# Altium PCB Room1.PcbDoc (part 2 of 2)
Units mil, origin at the board's own origin, x right, y up, seen from the top; angles counter-clockwise.
Board outline 3937.01 x 3937.01 mil, 2 copper layers (Top Layer, Bottom Layer); 51 components, 61 nets, 285 pads, 40 vias.
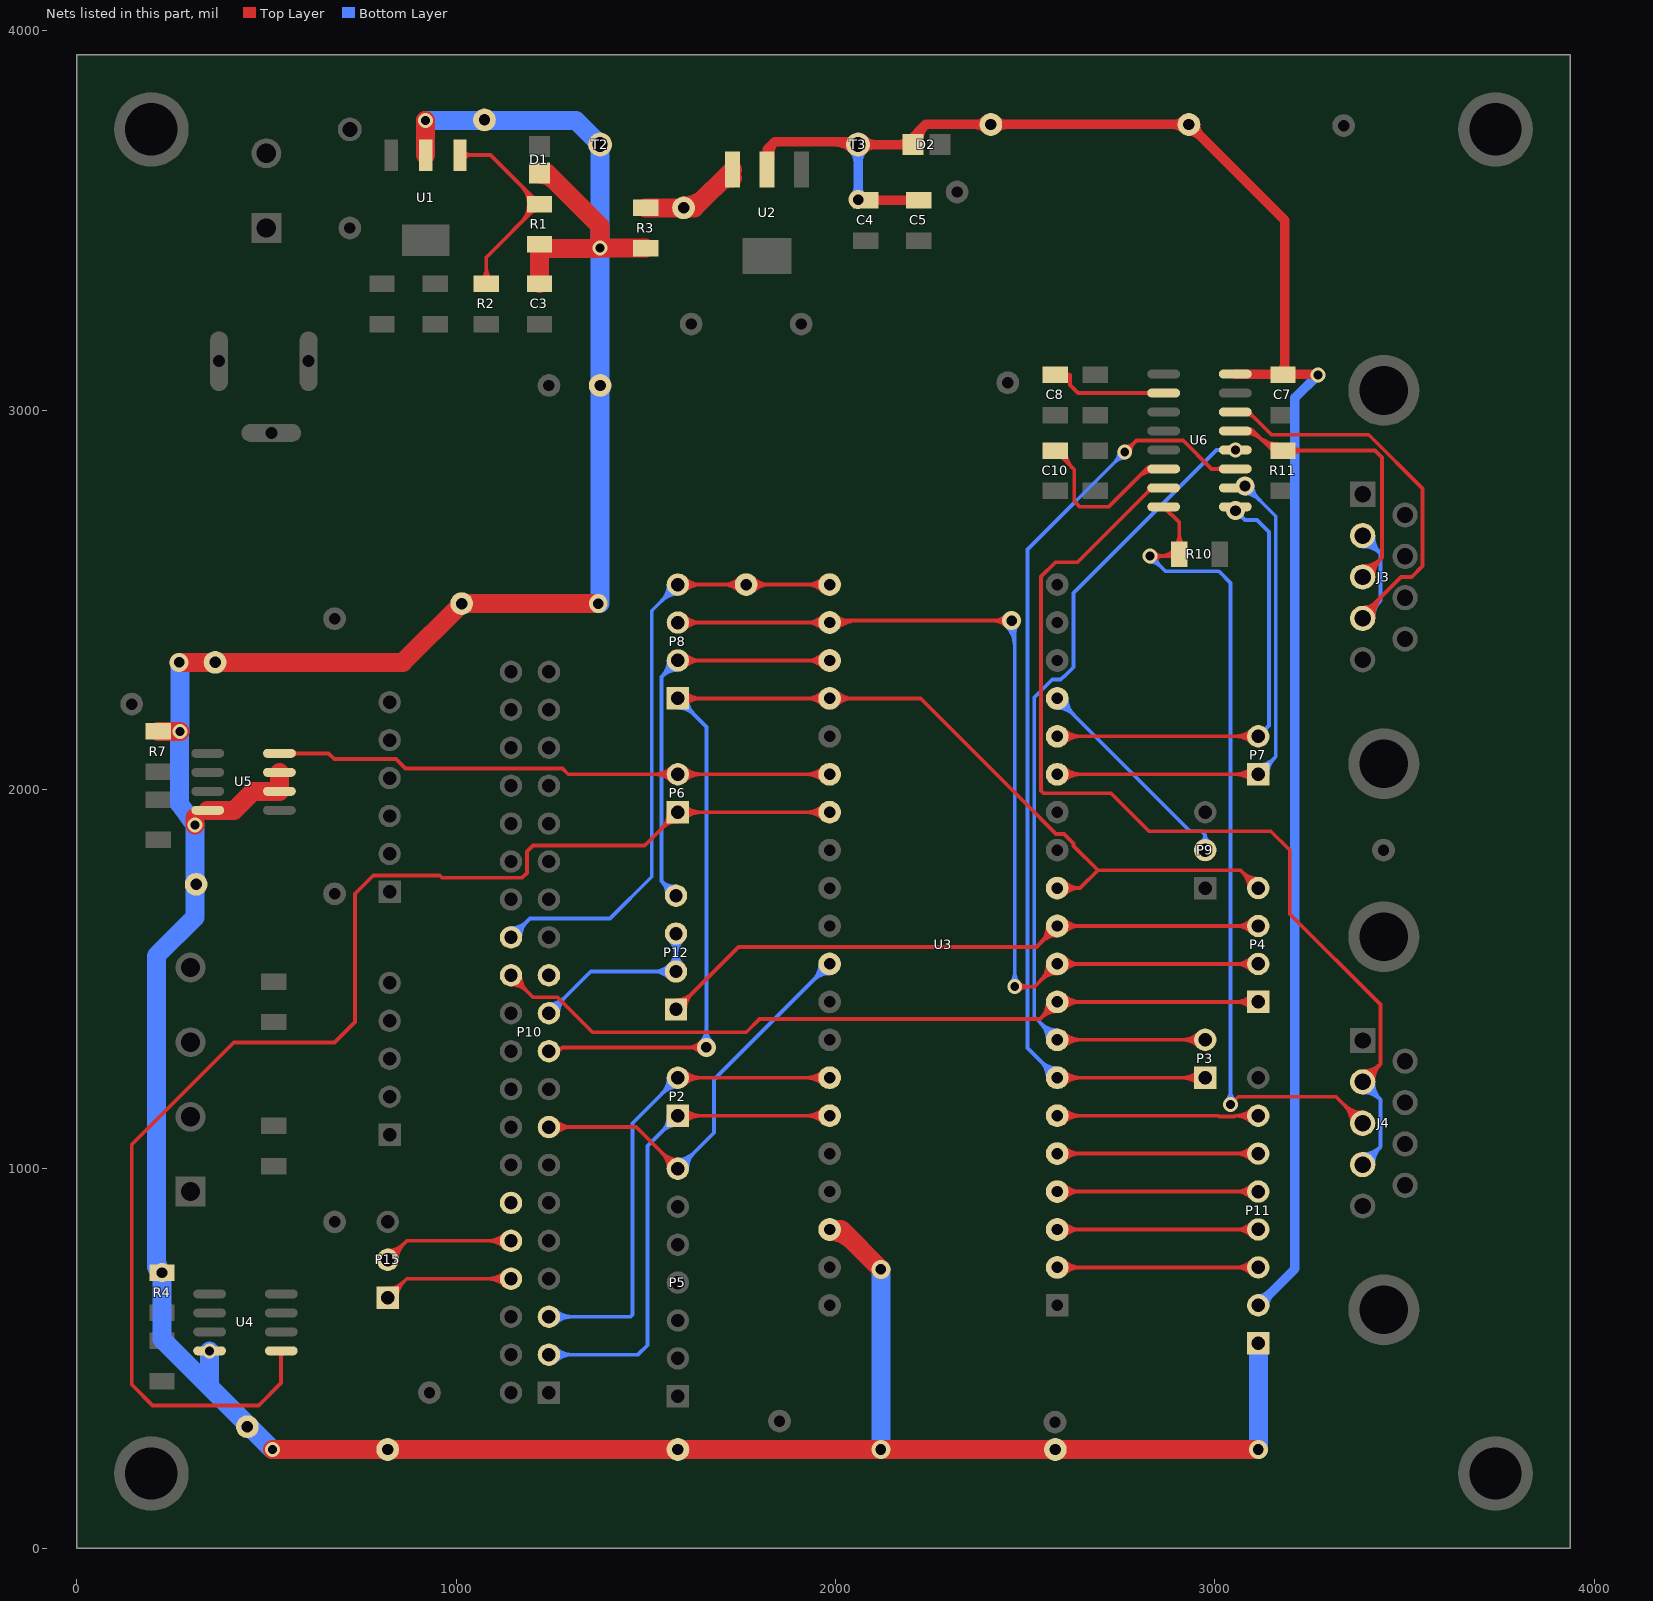
[diagram p2: the nets of this part, all layers, seen from the top]

## Via types
v1: diameter 50, hole 28, Top Layer to Bottom Layer, 25 vias
v2: diameter 39.37, hole 23.62, Top Layer to Bottom Layer, 15 vias

## Nets (pads, with @x,y where several pads share a name; then routed paths per layer and width w, separated by ;. In a path a pad name is that pad's centre, name@x,y a point inside that pad or via, vN(x,y) a via of type N, cw(c..) or ccw(c..) an arc to the next point about the centre after c; other vN are vias at no path point) (continued)
GS2R3: P5.7 P10.15 U3.30 | length 1687.3
  Top Layer w10: P10.15@1245,1110 1475,1110 P5.7@1585,1000 ; P10.15@1255.27,1099.73 cw(c1280.07,1074.93) 1280.07,1110 cw(c1280.07,1145.07) P10.15@1255.27,1120.27 ; P10.15@1262.34,1092.66 cw(c1304.21,1050.79) 1304.21,1110 cw(c1304.21,1169.21) P10.15@1262.34,1127.34 ; P5.7@1560.47,1000 ccw(c1501.26,1000) 1543.13,1041.87 ccw(c1585,1083.74) P5.7@1585,1024.53 ; P5.7@1570.47,1000 ccw(c1535.4,1000) 1560.2,1024.8 ccw(c1585,1049.6) P5.7@1585,1014.53
  Bottom Layer w10: P5.7@1585,1000 1680,1095 1680,1235 U3.30@1985,1540 ; P5.7@1585,1014.53 ccw(c1585,1049.6) 1609.8,1024.8 ccw(c1634.6,1000) P5.7@1599.53,1000 ; P5.7@1585,1024.53 ccw(c1585,1083.74) 1626.87,1041.87 ccw(c1668.74,1000) P5.7@1609.53,1000 ; U3.30@1960,1540 cw(c1899.64,1540) 1942.32,1497.32 cw(c1985,1454.64) U3.30@1985,1515 ; U3.30@1970,1540 cw(c1933.79,1540) 1959.39,1514.39 cw(c1985,1488.79) U3.30@1985,1525
GSA0: P11.6 U3.5 | length 829.8
  Top Layer w10: U3.5@2585,1040 P11.6@3115,1040 ; U3.5@2595.61,1029.39 cw(c2621.21,1003.79) 2621.21,1040 cw(c2621.21,1076.21) U3.5@2595.61,1050.61 ; U3.5@2602.68,1022.32 cw(c2645.36,979.64) 2645.36,1040 cw(c2645.36,1100.36) U3.5@2602.68,1057.68 ; P11.6@3097.66,1022.66 ccw(c3055.79,980.79) 3055.79,1040 ccw(c3055.79,1099.21) P11.6@3097.66,1057.34 ; P11.6@3104.73,1029.73 ccw(c3079.93,1004.93) 3079.93,1040 ccw(c3079.93,1075.07) P11.6@3104.73,1050.27
GSA1: P11.7 U3.6 | length 831.9
  Top Layer w10: U3.6@2585,1140 3009.44,1140 3012,1137.44 3052.44,1137.44 3055,1140 P11.7@3115,1140 ; U3.6@2595.61,1129.39 cw(c2621.21,1103.79) 2621.21,1140 cw(c2621.21,1176.21) U3.6@2595.61,1150.61 ; U3.6@2602.68,1122.32 cw(c2645.36,1079.64) 2645.36,1140 cw(c2645.36,1200.36) U3.6@2602.68,1157.68 ; P11.7@3097.66,1122.66 ccw(c3055.79,1080.79) 3055.79,1140 ccw(c3055.79,1199.21) P11.7@3097.66,1157.34 ; P11.7@3104.73,1129.73 ccw(c3079.93,1104.93) 3079.93,1140 ccw(c3079.93,1175.07) P11.7@3104.73,1150.27
GSC13: P11.3 U3.2 | length 829.8
  Top Layer w10: U3.2@2585,740 P11.3@3115,740 ; U3.2@2595.61,729.39 cw(c2621.21,703.79) 2621.21,740 cw(c2621.21,776.21) U3.2@2595.61,750.61 ; U3.2@2602.68,722.32 cw(c2645.36,679.64) 2645.36,740 cw(c2645.36,800.36) U3.2@2602.68,757.68 ; P11.3@3097.66,722.66 ccw(c3055.79,680.79) 3055.79,740 ccw(c3055.79,799.21) P11.3@3097.66,757.34 ; P11.3@3104.73,729.73 ccw(c3079.93,704.93) 3079.93,740 ccw(c3079.93,775.07) P11.3@3104.73,750.27
GSC14: P11.4 U3.3 | length 829.8
  Top Layer w10: U3.3@2585,840 P11.4@3115,840 ; U3.3@2595.61,829.39 cw(c2621.21,803.79) 2621.21,840 cw(c2621.21,876.21) U3.3@2595.61,850.61 ; U3.3@2602.68,822.32 cw(c2645.36,779.64) 2645.36,840 cw(c2645.36,900.36) U3.3@2602.68,857.68 ; P11.4@3097.66,822.66 ccw(c3055.79,780.79) 3055.79,840 ccw(c3055.79,899.21) P11.4@3097.66,857.34 ; P11.4@3104.73,829.73 ccw(c3079.93,804.93) 3079.93,840 ccw(c3079.93,875.07) P11.4@3104.73,850.27
GSC15: P11.5 U3.4 | length 829.8
  Top Layer w10: U3.4@2585,940 P11.5@3115,940 ; U3.4@2595.61,929.39 cw(c2621.21,903.79) 2621.21,940 cw(c2621.21,976.21) U3.4@2595.61,950.61 ; U3.4@2602.68,922.32 cw(c2645.36,879.64) 2645.36,940 cw(c2645.36,1000.36) U3.4@2602.68,957.68 ; P11.5@3097.66,922.66 ccw(c3055.79,880.79) 3055.79,940 ccw(c3055.79,999.21) P11.5@3097.66,957.34 ; P11.5@3104.73,929.73 ccw(c3079.93,904.93) 3079.93,940 ccw(c3079.93,975.07) P11.5@3104.73,950.27
I2C_SCL: P2.2 P10.5 U3.27 | length 1892.8
  Top Layer w10: P2.2@1585,1240 U3.27@1985,1240 ; P2.2@1595.27,1229.73 cw(c1620.07,1204.93) 1620.07,1240 cw(c1620.07,1275.07) P2.2@1595.27,1250.27 ; P2.2@1602.34,1222.66 cw(c1644.21,1180.79) 1644.21,1240 cw(c1644.21,1299.21) P2.2@1602.34,1257.34 ; U3.27@1967.32,1222.32 ccw(c1924.64,1179.64) 1924.64,1240 ccw(c1924.64,1300.36) U3.27@1967.32,1257.68 ; U3.27@1974.39,1229.39 ccw(c1948.79,1203.79) 1948.79,1240 ccw(c1948.79,1276.21) U3.27@1974.39,1250.61
  Bottom Layer w10: P10.5@1245,610 1460,610 1465,615 1465,1120 P2.2@1585,1240 ; P10.5@1255.27,599.73 cw(c1280.07,574.93) 1280.07,610 cw(c1280.07,645.07) P10.5@1255.27,620.27 ; P10.5@1262.34,592.66 cw(c1304.21,550.79) 1304.21,610 cw(c1304.21,669.21) P10.5@1262.34,627.34 ; P2.2@1560.47,1240 cw(c1501.26,1240) 1543.13,1198.13 cw(c1585,1156.26) P2.2@1585,1215.47 ; P2.2@1570.47,1240 cw(c1535.4,1240) 1560.2,1215.2 cw(c1585,1190.4) P2.2@1585,1225.47
I2C_SDA: P2.1 P10.3 U3.26 | length 1904.5
  Top Layer w10: P2.1@1585,1140 U3.26@1985,1140 ; P2.1@1595.27,1129.73 cw(c1620.07,1104.93) 1620.07,1140 cw(c1620.07,1175.07) P2.1@1595.27,1150.27 ; P2.1@1602.34,1122.66 cw(c1644.21,1080.79) 1644.21,1140 cw(c1644.21,1199.21) P2.1@1602.34,1157.34 ; U3.26@1967.32,1122.32 ccw(c1924.64,1079.64) 1924.64,1140 ccw(c1924.64,1200.36) U3.26@1967.32,1157.68 ; U3.26@1974.39,1129.39 ccw(c1948.79,1103.79) 1948.79,1140 ccw(c1948.79,1176.21) U3.26@1974.39,1150.61
  Bottom Layer w10: P10.3@1245,510 1480,510 1505,535 1505,1060 P2.1@1585,1140 ; P10.3@1255.27,499.73 cw(c1280.07,474.93) 1280.07,510 cw(c1280.07,545.07) P10.3@1255.27,520.27 ; P10.3@1262.34,492.66 cw(c1304.21,450.79) 1304.21,510 cw(c1304.21,569.21) P10.3@1262.34,527.34 ; P2.1@1560.47,1140 cw(c1501.26,1140) 1543.13,1098.13 cw(c1585,1056.26) P2.1@1585,1115.47 ; P2.1@1570.47,1140 cw(c1535.4,1140) 1560.2,1115.2 cw(c1585,1090.4) P2.1@1585,1125.47
J3RX: J3.3 R11.2 U6.13 | length 1218.1
  Top Layer w10: U6.13@3054.49,2945 3101.15,2945 ; U6.13@3084.22,2947.66 cw(c3091.18,2937.16) 3100.08,2946.07 ; U6.13@3085.98,2938.19 cw(c3085.98,2885.13) 3123.5,2922.65 ; U6.13@3085.98,2948.19 cw(c3085.98,2919.27) 3106.43,2939.72 ; U6.13@3089.75,2939.32 cw(c3098.07,2926.76) 3108.73,2937.42 ; U6.13@3091.08,2940.48 cw(c3101.15,2931.52) 3101.15,2945 ; U6.13@3091.08,2949.52 ccw(c3101.15,2958.48) 3101.15,2945 ; 3113.83,2932.32 ccw(c3168.19,2986.68) R11.2@3168.19,2909.8 ; 3130.9,2915.25 ccw(c3168.19,2952.54) R11.2@3168.19,2899.8 ; R11.2@3203.59,2881.37 cw(c3232.02,2852.94) 3232.02,2893.15 cw(c3232.02,2933.36) R11.2@3203.59,2904.93 ; J3.3@3390.08,2560 3441,2610.92 3441,2875 3422.85,2893.15 R11.2@3180,2893.15 3153,2893.15 3101.15,2945 ; J3.3@3390.08,2578.27 ccw(c3390.08,2622.37) 3421.26,2591.18 ccw(c3452.45,2560) J3.3@3408.35,2560 ; J3.3@3390.08,2588.27 ccw(c3390.08,2656.51) 3438.33,2608.26 ccw(c3486.59,2560) J3.3@3418.35,2560
J3TX: J3.2 J3.4 U6.14 | length 1802.3
  Top Layer w10: U6.14@3054.49,2995 3090,2995 3150,2935 3406.28,2935 3548.03,2793.25 3548.03,2588.69 3519.34,2560 3491.16,2560 J3.4@3390.08,2458.91 ; U6.14@3085.98,2988.19 cw(c3085.98,2962.05) 3104.47,2980.53 ; J3.4@3386.09,2454.93 J3.4@3390.08,2450.95 ; J3.4@3390.08,2479.21 ccw(c3390.08,2528.22) 3424.73,2493.57 ; J3.4@3398.35,2450.95 cw(c3437.54,2450.95) 3409.83,2478.66 ; J3.4@3408.35,2450.95 cw(c3471.68,2450.95) 3426.9,2495.73 ; J3.4@3418.35,2450.95 cw(c3505.83,2450.95) 3443.97,2512.8
  Bottom Layer w10: J3.4@3390.08,2450.95 3437,2497.87 ; J3.2@3390.08,2669.06 3437,2622.13 ; J3.4@3390.44,2469.21 ccw(c3391.27,2510.4) 3420.4,2481.27 ccw(c3449.53,2452.14) J3.4@3408.34,2451.31 ; J3.2@3390.44,2650.79 cw(c3391.27,2609.61) 3420.4,2638.73 cw(c3449.53,2667.86) J3.2@3408.34,2668.69 ; J3.4@3390.64,2479.21 ccw(c3391.92,2542.94) 3437,2497.87 ; J3.2@3390.64,2640.79 cw(c3391.92,2577.06) 3437,2622.14 ; J3.4@3418.34,2451.51 cw(c3482.07,2452.79) 3437,2497.87 ; J3.2@3418.34,2668.49 ccw(c3482.07,2667.21) 3437,2622.14 ; 3437,2497.87 3437,2622.13
J4RX: J4.3 R10.2 U6.8 | length 2727.6
  Top Layer w10: v2(2830,2615) R10.2@2906.85,2615 ; v2@2840.38,2604.62 cw(c2865.45,2579.55) 2865.45,2615 cw(c2865.45,2650.45) v2@2840.38,2625.38 ; 2854.57,2615 ccw(c2854.57,2672.28) R10.2@2895.07,2631.78 ; U6.8@2865.51,2745 2906.85,2703.66 R10.2@2906.85,2620 R10.2@2906.85,2608 ; R10.2@2895.07,2608.22 ccw(c2878.72,2591.87) 2878.72,2615 ccw(c2878.72,2648.13) R10.2@2902.15,2624.7 ; R10.2@2895.07,2643.59 ccw(c2866.64,2672.02) 2906.85,2672.02 ccw(c2947.06,2672.02) R10.2@2918.63,2643.59 ; v2(3042,1170) 3062,1190 3320.08,1190 J4.3@3390.08,1120 ; J4.3@3361.81,1120 ccw(c3293.57,1120) 3341.82,1168.26 ccw(c3390.08,1216.51) J4.3@3390.08,1148.27 ; J4.3@3371.81,1120 ccw(c3327.71,1120) 3358.89,1151.18 ccw(c3390.08,1182.37) J4.3@3390.08,1138.27
  Bottom Layer w10: v2@2830,2600.31 cw(c2830,2564.86) 2855.07,2589.93 cw(c2880.14,2615) v2@2844.69,2615 ; v2(2830,2615) 2870,2575 3011,2575 3042,2544 v2(3042,1170) ; v2@3031.62,1180.38 ccw(c3006.55,1205.45) 3042,1205.45 ccw(c3077.45,1205.45) v2@3052.38,1180.38
J4TX: J4.2 J4.4 U6.7 | length 3224.6
  Top Layer w10: 2822.36,2783.36 cw(c2834.02,2771.71) U6.7@2834.02,2788.19 ; 2822.4,2783.4 ccw(c2810.8,2795) U6.7@2827.2,2795 ; U6.7@2865.51,2795 2834,2795 2638,2599 2580,2599 2542.13,2561.13 2542.13,1997 2549.13,1990 2727,1990 2827,1890 3148,1890 3198,1840 3198,1672 3437,1433 3437,1275.98 ; J4.2@3390.08,1229.06 3437,1275.98 ; J4.2@3390.44,1247.32 ccw(c3391.27,1288.51) 3420.4,1259.38 ccw(c3449.53,1230.25) J4.2@3408.34,1229.42 ; J4.2@3390.64,1257.32 ccw(c3391.92,1321.05) 3437,1275.98 ; J4.2@3418.34,1229.62 cw(c3482.07,1230.9) 3437,1275.98
  Bottom Layer w10: J4.4@3390.08,1010.95 3437,1057.87 ; J4.2@3390.08,1229.06 3437,1182.13 ; J4.4@3390.44,1029.21 ccw(c3391.27,1070.4) 3420.4,1041.27 ccw(c3449.53,1012.14) J4.4@3408.34,1011.31 ; J4.2@3390.44,1210.79 cw(c3391.27,1169.61) 3420.4,1198.73 cw(c3449.53,1227.86) J4.2@3408.34,1228.69 ; J4.4@3390.64,1039.21 ccw(c3391.92,1102.94) 3437,1057.87 ; J4.2@3390.64,1200.79 cw(c3391.92,1137.06) 3437,1182.14 ; J4.4@3418.34,1011.51 cw(c3482.07,1012.79) 3437,1057.87 ; J4.2@3418.34,1228.49 ccw(c3482.07,1227.21) 3437,1182.14 ; 3437,1057.87 3437,1182.13
NetR1_1: R1.1 R2.2 U1.1 | length 838.6
  Top Layer w10: U1.1@1010.55,3672.2 1090.95,3672.2 R1.1@1220,3543.15 1080,3403.15 R2.2@1080,3333.15 ; U1.1@1019.54,3663.21 cw(c1041.25,3641.5) 1041.25,3672.2 cw(c1041.25,3702.9) U1.1@1019.54,3681.2 ; R2.2@1068.22,3344.93 ccw(c1039.79,3373.36) 1080,3373.36 ccw(c1120.21,3373.36) R2.2@1091.78,3344.93 ; 1171.41,3494.56 ccw(c1122.82,3543.15) 1191.54,3543.15 ccw(c1122.82,3543.15) 1171.41,3591.74 ; 1188.48,3511.63 ccw(c1156.96,3543.15) 1201.54,3543.15 ccw(c1156.96,3543.15) 1188.48,3574.67 ; R1.1@1199.92,3523.07 cw(c1208.19,3514.81) R1.1@1208.19,3526.5 ; R1.1@1199.92,3563.23 ccw(c1208.19,3571.49) R1.1@1208.19,3559.8
NetR3_2: pad.17 R3.2 U2.3 | length 376.8
  Top Layer w50: R3.2@1500,3533.15 1628.42,3533.15 U2.3@1729.45,3634.17 ; pad.17@1600,3538.15 ccw(c1600,3618.84) 1657.06,3561.78 ; 1691.47,3596.2 cw(c1729.45,3558.23) U2.3@1729.45,3611.93
NRST: P9.2 U3.17 | length 775.6
  Bottom Layer w10: U3.17@2585,2215 cw(c2585,2154.64) 2627.68,2197.32 cw(c2670.36,2240) U3.17@2610,2240 ; U3.17@2585,2225 cw(c2585,2188.79) 2610.61,2214.39 cw(c2636.21,2240) U3.17@2600,2240 ; U3.17@2585,2240 2935,1890 2965,1890 2975,1880 ; P9.2@2963.88,1861.86 ccw(c2954.65,1880) 2975,1880 ; P9.2@2975,1840 2975,1880 ; P9.2@2986.12,1861.86 cw(c2995.35,1880) 2975,1880
RGR2S1: P10.12
RU0RX: P10.10 P15.2 | length 641.9
  Top Layer w10: P15.2@820,760 870,810 P10.10@1145,810 ; P15.2@820,774.53 ccw(c820,809.6) 844.8,784.8 ccw(c869.6,760) P15.2@834.53,760 ; P15.2@820,784.53 ccw(c820,843.74) 861.87,801.87 ccw(c903.74,760) P15.2@844.53,760 ; P10.10@1127.66,792.66 ccw(c1085.79,750.79) 1085.79,810 ccw(c1085.79,869.21) P10.10@1127.66,827.34 ; P10.10@1134.73,799.73 ccw(c1109.93,774.93) 1109.93,810 ccw(c1109.93,845.07) P10.10@1134.73,820.27
RU0TX: P10.8 P15.1 | length 641.9
  Top Layer w10: P15.1@820,660 870,710 P10.8@1145,710 ; P15.1@820,674.53 ccw(c820,709.6) 844.8,684.8 ccw(c869.6,660) P15.1@834.53,660 ; P15.1@820,684.53 ccw(c820,743.74) 861.87,701.87 ccw(c903.74,660) P15.1@844.53,660 ; P10.8@1127.66,692.66 ccw(c1085.79,650.79) 1085.79,710 ccw(c1085.79,769.21) P10.8@1127.66,727.34 ; P10.8@1134.73,699.73 ccw(c1109.93,674.93) 1109.93,710 ccw(c1109.93,745.07) P10.8@1134.73,720.27
SPI1_MISO: P4.3 P12.1 U3.11 | length 2225.7
  Top Layer w10: P12.1@1580,1420 1745,1585 2530,1585 U3.11@2585,1640 P4.3@3115,1640 ; P12.1@1580,1434.53 ccw(c1580,1469.6) 1604.8,1444.8 ccw(c1629.6,1420) P12.1@1594.53,1420 ; P12.1@1580,1444.53 ccw(c1580,1503.74) 1621.87,1461.87 ccw(c1663.74,1420) P12.1@1604.53,1420 ; U3.11@2560,1640 cw(c2499.64,1640) 2542.32,1597.32 cw(c2585,1554.64) U3.11@2585,1615 ; U3.11@2570,1640 cw(c2533.79,1640) 2559.39,1614.39 cw(c2585,1588.79) U3.11@2585,1625 ; U3.11@2595.61,1629.39 cw(c2621.21,1603.79) 2621.21,1640 cw(c2621.21,1676.21) U3.11@2595.61,1650.61 ; U3.11@2602.68,1622.32 cw(c2645.36,1579.64) 2645.36,1640 cw(c2645.36,1700.36) U3.11@2602.68,1657.68 ; P4.3@3097.66,1622.66 ccw(c3055.79,1580.79) 3055.79,1640 ccw(c3055.79,1699.21) P4.3@3097.66,1657.34 ; P4.3@3104.73,1629.73 ccw(c3079.93,1604.93) 3079.93,1640 ccw(c3079.93,1675.07) P4.3@3104.73,1650.27
SPI1_MOSI: P4.4 P8.1 P10.19 U3.12 U3.37 | length 4294.9
  Top Layer w10: P10.19@1245,1310 1270,1310 1280,1320 v1(1660,1320) ; P8.1@1585,2240 U3.37@1985,2240 2225,2240 2542.13,1922.87 2542.13,1922.24 2581.49,1882.87 2602.76,1882.87 2627.87,1857.76 2627.87,1851.13 2692,1787 ; P8.1@1595.27,2229.73 cw(c1620.07,2204.93) 1620.07,2240 cw(c1620.07,2275.07) P8.1@1595.27,2250.27 ; P8.1@1602.34,2222.66 cw(c1644.21,2180.79) 1644.21,2240 cw(c1644.21,2299.21) P8.1@1602.34,2257.34 ; v1@1645.86,1305.86 ccw(c1611.72,1271.72) 1611.72,1320 ccw(c1611.72,1368.28) v1@1645.86,1334.14 ; U3.37@1967.32,2222.32 ccw(c1924.64,2179.64) 1924.64,2240 ccw(c1924.64,2300.36) U3.37@1967.32,2257.68 ; U3.37@1974.39,2229.39 ccw(c1948.79,2203.79) 1948.79,2240 ccw(c1948.79,2276.21) U3.37@1974.39,2250.61 ; U3.37@1995.61,2229.39 cw(c2021.21,2203.79) 2021.21,2240 cw(c2021.21,2276.21) U3.37@1995.61,2250.61 ; U3.37@2002.68,2222.32 cw(c2045.36,2179.64) 2045.36,2240 cw(c2045.36,2300.36) U3.37@2002.68,2257.68 ; U3.12@2585,1740 2645,1740 ; U3.12@2595.65,1729.44 cw(c2621,1704.3) 2621,1740 cw(c2621,1775.7) U3.12@2595.65,1750.56 ; U3.12@2602.75,1722.4 cw(c2645,1680.51) 2645,1740 ; U3.12@2602.75,1757.6 ccw(c2645,1799.49) 2645,1740 ; P4.4@3090.47,1740 ccw(c3031.26,1740) 3073.13,1781.87 ccw(c3115,1823.74) P4.4@3115,1764.53 ; P4.4@3100.47,1740 ccw(c3065.4,1740) 3090.2,1764.8 ccw(c3115,1789.6) P4.4@3115,1754.53 ; P4.4@3115,1740 3068,1787 2692,1787 ; 2645,1740 2692,1787
  Bottom Layer w10: P8.1@1585,2215.47 cw(c1585,2156.26) 1626.87,2198.13 cw(c1668.74,2240) P8.1@1609.53,2240 ; P8.1@1585,2225.47 cw(c1585,2190.4) 1609.8,2215.2 cw(c1634.6,2240) P8.1@1599.53,2240 ; P8.1@1585,2240 1660,2165 v1@1660,1335 ; v1@1645.86,1334.14 ccw(c1611.72,1368.28) 1660,1368.28 ccw(c1708.28,1368.28) v1@1674.14,1334.14 ; v1@1650,1338 1660,1328 v1(1660,1320)
SPI1_NSS: P4.1 P10.24 U3.9 | length 2664.9
  Top Layer w10: P10.24@1145,1485.47 cw(c1145,1426.26) 1186.87,1468.13 cw(c1228.74,1510) P10.24@1169.53,1510 ; P10.24@1145,1495.47 cw(c1145,1460.4) 1169.8,1485.2 cw(c1194.6,1510) P10.24@1159.53,1510 ; P10.24@1145,1510 1202.6,1452.4 1267.6,1452.4 1360,1360 1765,1360 1800,1395 2540,1395 U3.9@2585,1440 P4.1@3115,1440 ; U3.9@2560,1440 cw(c2499.64,1440) 2542.32,1397.32 cw(c2585,1354.64) U3.9@2585,1415 ; U3.9@2570,1440 cw(c2533.79,1440) 2559.39,1414.39 cw(c2585,1388.79) U3.9@2585,1425 ; U3.9@2595.61,1429.39 cw(c2621.21,1403.79) 2621.21,1440 cw(c2621.21,1476.21) U3.9@2595.61,1450.61 ; U3.9@2602.68,1422.32 cw(c2645.36,1379.64) 2645.36,1440 cw(c2645.36,1500.36) U3.9@2602.68,1457.68 ; P4.1@3097.66,1422.66 ccw(c3055.79,1380.79) 3055.79,1440 ccw(c3055.79,1499.21) P4.1@3097.66,1457.34 ; P4.1@3104.73,1429.73 ccw(c3079.93,1404.93) 3079.93,1440 ccw(c3079.93,1475.07) P4.1@3104.73,1450.27
SPI1_SCK: P4.2 P8.3 U3.10 U3.39 | length 3697.3
  Top Layer w10: P8.3@1585,2440 U3.39@1985,2440 1990,2445 v1(2465,2445) ; P8.3@1595.27,2429.73 cw(c1620.07,2404.93) 1620.07,2440 cw(c1620.07,2475.07) P8.3@1595.27,2450.27 ; P8.3@1602.34,2422.66 cw(c1644.21,2380.79) 1644.21,2440 cw(c1644.21,2499.21) P8.3@1602.34,2457.34 ; U3.39@1967.32,2422.32 ccw(c1924.64,2379.64) 1924.64,2440 ccw(c1924.64,2500.36) U3.39@1967.32,2457.68 ; U3.39@1974.39,2429.39 ccw(c1948.79,2403.79) 1948.79,2440 ccw(c1948.79,2476.21) U3.39@1974.39,2450.61 ; U3.39@1995.61,2429.39 cw(c2033.28,2391.72) 2033.28,2445 cw(c2033.28,2488.28) U3.39@2002.68,2457.68 ; U3.39@2002.68,2422.32 cw(c2057.43,2367.57) 2057.43,2445 ; v1@2450.86,2430.86 ccw(c2416.72,2396.72) 2416.72,2445 ccw(c2416.72,2493.28) v1@2450.86,2459.14 ; v2(2473,1480) 2525,1480 U3.10@2585,1540 P4.2@3115,1540 ; v2@2483.38,1469.62 cw(c2508.45,1444.55) 2508.45,1480 cw(c2508.45,1515.45) v2@2483.38,1490.38 ; U3.10@2560,1540 cw(c2499.64,1540) 2542.32,1497.32 cw(c2585,1454.64) U3.10@2585,1515 ; U3.10@2570,1540 cw(c2533.79,1540) 2559.39,1514.39 cw(c2585,1488.79) U3.10@2585,1525 ; U3.10@2595.61,1529.39 cw(c2621.21,1503.79) 2621.21,1540 cw(c2621.21,1576.21) U3.10@2595.61,1550.61 ; U3.10@2602.68,1522.32 cw(c2645.36,1479.64) 2645.36,1540 cw(c2645.36,1600.36) U3.10@2602.68,1557.68 ; P4.2@3097.66,1522.66 ccw(c3055.79,1480.79) 3055.79,1540 ccw(c3055.79,1599.21) P4.2@3097.66,1557.34 ; P4.2@3104.73,1529.73 ccw(c3079.93,1504.93) 3079.93,1540 ccw(c3079.93,1575.07) P4.2@3104.73,1550.27
  Bottom Layer w10: v1@2450.86,2430.86 cw(c2397.4,2377.4) 2473,2377.4 ; v1@2457.93,2437.93 cw(c2421.54,2401.54) 2473,2401.54 ; v2@2462.62,1490.38 ccw(c2437.55,1515.45) 2473,1515.45 ccw(c2508.45,1515.45) v2@2483.38,1490.38 ; v2(2473,1480) v1@2473,2437 ; 2473,2416.03 cw(c2493.97,2416.03) v1@2479.14,2430.86
SPI2_MISO: P8.2 P12.4 U3.38 | length 1628.5
  Top Layer w10: P8.2@1585,2340 U3.38@1985,2340 ; P8.2@1595.27,2329.73 cw(c1620.07,2304.93) 1620.07,2340 cw(c1620.07,2375.07) P8.2@1595.27,2350.27 ; P8.2@1602.34,2322.66 cw(c1644.21,2280.79) 1644.21,2340 cw(c1644.21,2399.21) P8.2@1602.34,2357.34 ; U3.38@1967.32,2322.32 ccw(c1924.64,2279.64) 1924.64,2340 ccw(c1924.64,2400.36) U3.38@1967.32,2357.68 ; U3.38@1974.39,2329.39 ccw(c1948.79,2303.79) 1948.79,2340 ccw(c1948.79,2376.21) U3.38@1974.39,2350.61
  Bottom Layer w10: P12.4@1555.53,1721.74 ccw(c1509.05,1725.04) 1542,1758 ; P8.2@1560.47,2340 cw(c1501.26,2340) 1543.13,2298.13 cw(c1585,2256.26) P8.2@1585,2315.47 ; P12.4@1565.51,1721.03 ccw(c1537.98,1722.99) 1557.49,1742.51 ccw(c1577.01,1762.02) P12.4@1578.97,1734.49 ; P8.2@1570.47,2340 cw(c1535.4,2340) 1560.2,2315.2 cw(c1585,2290.4) P8.2@1585,2325.47 ; P12.4@1578.26,1744.47 cw(c1574.96,1790.95) 1542,1758 ; P12.4@1580,1720 1542,1758 ; P8.2@1585,2340 1542,2297 1542,1758
SPI2_NSS: P8.4 P10.26 pad.27 U3.40 | length 2535.2
  Top Layer w10: P8.4@1585,2540 U3.40@1985,2540 ; P8.4@1595.27,2529.73 cw(c1620.07,2504.93) 1620.07,2540 cw(c1620.07,2575.07) P8.4@1595.27,2550.27 ; P8.4@1602.34,2522.66 cw(c1644.21,2480.79) 1644.21,2540 cw(c1644.21,2599.21) P8.4@1602.34,2557.34 ; pad.27@1747.32,2522.32 ccw(c1704.64,2479.64) 1704.64,2540 ccw(c1704.64,2600.36) pad.27@1747.32,2557.68 ; pad.27@1754.39,2529.39 ccw(c1728.79,2503.79) 1728.79,2540 ccw(c1728.79,2576.21) pad.27@1754.39,2550.61 ; pad.27@1775.61,2529.39 cw(c1801.21,2503.79) 1801.21,2540 cw(c1801.21,2576.21) pad.27@1775.61,2550.61 ; pad.27@1782.68,2522.32 cw(c1825.36,2479.64) 1825.36,2540 cw(c1825.36,2600.36) pad.27@1782.68,2557.68 ; U3.40@1967.32,2522.32 ccw(c1924.64,2479.64) 1924.64,2540 ccw(c1924.64,2600.36) U3.40@1967.32,2557.68 ; U3.40@1974.39,2529.39 ccw(c1948.79,2503.79) 1948.79,2540 ccw(c1948.79,2576.21) U3.40@1974.39,2550.61
  Bottom Layer w10: P10.26@1145,1610 1195,1660 1406,1660 1516,1770 1516,2471 P8.4@1585,2540 ; P10.26@1145,1624.53 ccw(c1145,1659.6) 1169.8,1634.8 ccw(c1194.6,1610) P10.26@1159.53,1610 ; P10.26@1145,1634.53 ccw(c1145,1693.74) 1186.87,1651.87 ccw(c1228.74,1610) P10.26@1169.53,1610 ; P8.4@1560.47,2540 cw(c1501.26,2540) 1543.13,2498.13 cw(c1585,2456.26) P8.4@1585,2515.47 ; P8.4@1570.47,2540 cw(c1535.4,2540) 1560.2,2515.2 cw(c1585,2490.4) P8.4@1585,2525.47
SPI_MISO: P10.21 P12.2 P12.3 | length 1073
  Bottom Layer w10: P10.21@1245,1410 1355,1520 P12.2@1580,1520 P12.3@1580,1620 ; P10.21@1245,1424.53 ccw(c1245,1459.6) 1269.8,1434.8 ccw(c1294.6,1410) P10.21@1259.53,1410 ; P10.21@1245,1434.53 ccw(c1245,1493.74) 1286.87,1451.87 ccw(c1328.74,1410) P10.21@1269.53,1410 ; P12.2@1562.66,1502.66 ccw(c1520.79,1460.79) 1520.79,1520 ccw(c1520.79,1579.21) 1562.66,1537.34 ccw(c1520.79,1579.21) 1580,1579.21 ccw(c1639.21,1579.21) P12.2@1597.34,1537.34 ; P12.3@1562.66,1602.66 cw(c1520.79,1560.79) 1580,1560.79 cw(c1639.21,1560.79) P12.3@1597.34,1602.66 ; P12.2@1569.73,1509.73 ccw(c1544.93,1484.93) 1544.93,1520 ccw(c1544.93,1555.07) 1569.73,1530.27 ccw(c1544.93,1555.07) 1580,1555.07 ccw(c1615.07,1555.07) P12.2@1590.27,1530.27 ; P12.3@1569.73,1609.73 cw(c1544.93,1584.93) 1580,1584.93 cw(c1615.07,1584.93) P12.3@1590.27,1609.73
SPI_SCLK: P10.23
U1RX: P6.1 U3.34 U4.1 | length 4072.5
  Top Layer w10: U4.1@534.67,515.18 cw(c524.22,504.73) 539,504.73 ; 539,502.38 cw(c557.11,502.38) U4.1@544.3,515.18 ; U4.1@539.49,520 539,520 539,435 480,376 200,376 145,431 145,1064 414,1333 680,1333 734,1387 734,1725 782,1773 957,1773 963,1767 1174.4,1767 1187.4,1780 1187.4,1836.8 1203,1852.4 1497.4,1852.4 P6.1@1585,1940 U3.34@1985,1940 ; P6.1@1560.47,1940 cw(c1501.26,1940) 1543.13,1898.13 cw(c1585,1856.26) P6.1@1585,1915.47 ; P6.1@1570.47,1940 cw(c1535.4,1940) 1560.2,1915.2 cw(c1585,1890.4) P6.1@1585,1925.47 ; P6.1@1595.27,1929.73 cw(c1620.07,1904.93) 1620.07,1940 cw(c1620.07,1975.07) P6.1@1595.27,1950.27 ; P6.1@1602.34,1922.66 cw(c1644.21,1880.79) 1644.21,1940 cw(c1644.21,1999.21) P6.1@1602.34,1957.34 ; U3.34@1967.32,1922.32 ccw(c1924.64,1879.64) 1924.64,1940 ccw(c1924.64,2000.36) U3.34@1967.32,1957.68 ; U3.34@1974.39,1929.39 ccw(c1948.79,1903.79) 1948.79,1940 ccw(c1948.79,1976.21) U3.34@1974.39,1950.61
U1TX: P6.2 U3.35 U5.4 | length 1947
  Top Layer w10: U5.4@534.49,2095 664,2095 679,2080 842,2080 867,2055 1281,2055 1296,2040 P6.2@1585,2040 U3.35@1985,2040 ; U5.4@570.8,2090.18 cw(c582.43,2078.56) 582.43,2095 cw(c582.43,2111.44) U5.4@570.8,2099.82 ; P6.2@1567.66,2022.66 ccw(c1525.79,1980.79) 1525.79,2040 ccw(c1525.79,2099.21) P6.2@1567.66,2057.34 ; P6.2@1574.73,2029.73 ccw(c1549.93,2004.93) 1549.93,2040 ccw(c1549.93,2075.07) P6.2@1574.73,2050.27 ; P6.2@1595.27,2029.73 cw(c1620.07,2004.93) 1620.07,2040 cw(c1620.07,2075.07) P6.2@1595.27,2050.27 ; P6.2@1602.34,2022.66 cw(c1644.21,1980.79) 1644.21,2040 cw(c1644.21,2099.21) P6.2@1602.34,2057.34 ; U3.35@1967.32,2022.32 ccw(c1924.64,1979.64) 1924.64,2040 ccw(c1924.64,2100.36) U3.35@1967.32,2057.68 ; U3.35@1974.39,2029.39 ccw(c1948.79,2003.79) 1948.79,2040 ccw(c1948.79,2076.21) U3.35@1974.39,2050.61
U2RX: P3.2 U3.8 U6.12 | length 2761
  Top Layer w10: U3.8@2585,1340 P3.2@2975,1340 ; U3.8@2595.61,1329.39 cw(c2621.21,1303.79) 2621.21,1340 cw(c2621.21,1376.21) U3.8@2595.61,1350.61 ; U3.8@2602.68,1322.32 cw(c2645.36,1279.64) 2645.36,1340 cw(c2645.36,1400.36) U3.8@2602.68,1357.68 ; P3.2@2957.66,1322.66 ccw(c2915.79,1280.79) 2915.79,1340 ccw(c2915.79,1399.21) P3.2@2957.66,1357.34 ; P3.2@2964.73,1329.73 ccw(c2939.93,1304.93) 2939.93,1340 ccw(c2939.93,1375.07) P3.2@2964.73,1350.27 ; U6.12@3033.31,2895 v2(3054.49,2895)
  Bottom Layer w10: U3.8@2560,1340 ccw(c2499.64,1340) 2542.32,1382.68 ccw(c2585,1425.36) U3.8@2585,1365 ; U3.8@2570,1340 ccw(c2533.79,1340) 2559.39,1365.61 ccw(c2585,1391.21) U3.8@2585,1355 ; U3.8@2585,1340 2524.25,1400.75 2524.25,2242.25 2572,2290 2594,2290 2601.13,2297.13 2602.76,2297.13 2627.87,2322.24 2627.87,2517.87 3005,2895 v2(3054.49,2895) ; v2@3044.1,2884.62 ccw(c3019.04,2859.55) 3019.04,2895 ccw(c3019.04,2930.45) v2@3044.1,2905.38
U2TX: P3.1 U3.7 U6.11 | length 3101.9
  Top Layer w10: U3.7@2585,1240 P3.1@2975,1240 ; U3.7@2595.61,1229.39 cw(c2621.21,1203.79) 2621.21,1240 cw(c2621.21,1276.21) U3.7@2595.61,1250.61 ; U3.7@2602.68,1222.32 cw(c2645.36,1179.64) 2645.36,1240 cw(c2645.36,1300.36) U3.7@2602.68,1257.68 ; v2(2763,2889) 2794,2920 2917,2920 2992,2845 U6.11@3054.49,2845 ; v2@2763,2903.69 ccw(c2763,2939.14) 2788.07,2914.07 ccw(c2813.14,2889) v2@2777.69,2889 ; P3.1@2957.66,1222.66 ccw(c2915.79,1180.79) 2915.79,1240 ccw(c2915.79,1299.21) P3.1@2957.66,1257.34 ; P3.1@2964.73,1229.73 ccw(c2939.93,1204.93) 2939.93,1240 ccw(c2939.93,1275.07) P3.1@2964.73,1250.27 ; U6.11@3018.18,2840.18 ccw(c3006.55,2828.56) 3006.55,2845 ccw(c3006.55,2861.44) U6.11@3018.18,2849.82
  Bottom Layer w10: U3.7@2560,1240 ccw(c2499.64,1240) 2542.32,1282.68 ccw(c2585,1325.36) U3.7@2585,1265 ; U3.7@2570,1240 ccw(c2533.79,1240) 2559.39,1265.61 ccw(c2585,1291.21) U3.7@2585,1255 ; U3.7@2585,1240 2506.38,1318.62 2506.38,2632.38 v2(2763,2889) ; v2@2748.31,2889 cw(c2712.86,2889) 2737.93,2863.93 cw(c2763,2838.86) v2@2763,2874.31
U3RX: P7.2 U3.16 U6.9 | length 1503.3
  Top Layer w10: U3.16@2585,2140 P7.2@3115,2140 ; U3.16@2595.61,2129.39 cw(c2621.21,2103.79) 2621.21,2140 cw(c2621.21,2176.21) U3.16@2595.61,2150.61 ; U3.16@2602.68,2122.32 cw(c2645.36,2079.64) 2645.36,2140 cw(c2645.36,2200.36) U3.16@2602.68,2157.68 ; U6.9@3043,2745 U6.9@3054.49,2745 ; P7.2@3097.66,2122.66 ccw(c3055.79,2080.79) 3055.79,2140 ccw(c3055.79,2199.21) P7.2@3097.66,2157.34 ; P7.2@3104.73,2129.73 ccw(c3079.93,2104.93) 3079.93,2140 ccw(c3079.93,2175.07) P7.2@3104.73,2150.27
  Bottom Layer w10: v1(3055,2735) 3080,2710 3112,2710 3143.23,2678.77 3143.23,2168.23 P7.2@3115,2140
U3TX: P7.1 U3.15 U6.10 | length 1927.7
  Top Layer w10: U3.15@2585,2040 P7.1@3115,2040 ; U3.15@2595.61,2029.39 cw(c2621.21,2003.79) 2621.21,2040 cw(c2621.21,2076.21) U3.15@2595.61,2050.61 ; U3.15@2602.68,2022.32 cw(c2645.36,1979.64) 2645.36,2040 cw(c2645.36,2100.36) U3.15@2602.68,2057.68 ; U6.10@3054.49,2795 U6.10@3094,2795 ; P7.1@3097.66,2022.66 ccw(c3055.79,1980.79) 3055.79,2040 ccw(c3055.79,2099.21) P7.1@3097.66,2057.34 ; P7.1@3104.73,2029.73 ccw(c3079.93,2004.93) 3079.93,2040 ccw(c3079.93,2075.07) P7.1@3104.73,2050.27
  Bottom Layer w10: v1@3080,2780 cw(c3080,2729.05) 3116.03,2765.08 ; v1@3080,2790 cw(c3080,2763.19) 3098.96,2782.15 ; v1(3080,2800) 3081.1,2800 3161.1,2720 3161.1,2086.1 P7.1@3115,2040 ; v1@3100,2800 ccw(c3145.62,2800) 3113.36,2767.74 ; P7.1@3115,2054.53 ccw(c3115,2089.6) 3139.8,2064.8 ccw(c3164.6,2040) P7.1@3129.53,2040 ; P7.1@3115,2064.53 ccw(c3115,2123.74) 3156.87,2081.87 ccw(c3198.74,2040) P7.1@3139.53,2040
V+: C8.2 U6.2 | length 377.7
  Top Layer w10: C8.2@2580,3093.15 2619,3093.15 ; C8.2@2606.65,3085.58 cw(c2619,3079.28) 2619,3093.15 ; C8.2@2606.65,3100.72 ccw(c2619,3107.02) 2619,3093.15 ; U6.2@2829.2,3040.18 ccw(c2817.57,3028.56) 2817.57,3045 ccw(c2817.57,3061.44) U6.2@2829.2,3049.82 ; U6.2@2865.51,3045 2640,3045 2619,3066 2619,3093.15
V-: C10.2 U6.6 | length 638.6
  Top Layer w10: C10.2@2580,2893.15 2630,2843.15 2630,2760 2645,2745 2720,2745 2820,2845 ; C10.2@2591.81,2876.5 cw(c2591.81,2864.81) C10.2@2600.08,2873.07 ; C10.2@2598.44,2892.61 ccw(c2634.17,2889.68) 2608.82,2864.33 ; C10.2@2608.41,2891.79 ccw(c2662.39,2887.36) 2624.09,2849.06 ; 2798.46,2823.46 cw(c2834.02,2787.91) U6.6@2834.02,2838.19 ; 2812.99,2837.99 cw(c2822.39,2828.59) U6.6@2830.08,2839.44 ; 2815.53,2840.53 cw(c2834.02,2822.05) U6.6@2834.02,2848.19 ; 2821.37,2846.37 cw(c2829.34,2838.4) U6.6@2835.86,2847.6 ; U6.6@2828.66,2840.79 ccw(c2820,2833.99) 2820,2845 ; U6.6@2828.66,2849.21 cw(c2820,2856.01) 2820,2845 ; U6.6@2865.51,2845 2820,2845
VCC3.3: C4.2 C5.2 C7.1 D2.1 P11.2 pad.3@2410,3753 pad.21 T3.1 U2.2 U6.16 | length 6104.1
  Top Layer w25: U2.2@1820,3634.17 1820,3687 1840,3707 ; U2.2@1827.03,3663.23 cw(c1873.83,3673.17) 1840,3707 ; 1997.24,3707 cw(c1997.24,3637.24) T3.1@2046.57,3686.57 ; C4.2@2068.84,3546.16 cw(c2085.71,3529.29) C4.2@2085.71,3553.15 ; C4.2@2068.84,3563.84 ccw(c2094.64,3589.64) C4.2@2094.64,3553.15 ; T3.1@2073.43,3686.57 cw(c2105.86,3654.14) 2105.86,3700 cw(c2105.86,3745.86) T3.1@2073.43,3713.43 ; C4.2@2080,3553.15 C5.2@2220,3553.15 C5.2@2205.3,3553.15 ; C4.2@2098.28,3546.68 cw(c2113.91,3531.05) 2113.91,3553.15 cw(c2113.91,3575.25) C4.2@2098.28,3559.62 ; D2.1@2193.92,3689.35 ccw(c2168.21,3663.64) 2168.21,3700 ccw(c2168.21,3736.36) D2.1@2193.92,3710.65 ; D2.1@2194.57,3710 2195,3710 2238,3753 ; C5.2@2201.72,3546.68 ccw(c2186.09,3531.05) 2186.09,3553.15 ccw(c2186.09,3575.25) C5.2@2201.72,3559.62 ; D2.1@2204.57,3700 T3.1@2060,3700 2060,3707 1840,3707 ; D2.1@2219.55,3701.47 cw(c2283.26,3707.73) 2238,3753 ; pad.3@2397.63,3740.63 ccw(c2367.75,3710.75) 2367.75,3753 ccw(c2367.75,3795.25) pad.3@2397.63,3765.37 ; pad.3@2422.37,3740.63 cw(c2452.25,3710.75) 2452.25,3753 cw(c2452.25,3795.25) pad.3@2422.37,3765.37 ; pad.21@2919.63,3740.63 ccw(c2889.75,3710.75) 2889.75,3753 ccw(c2889.75,3795.25) pad.21@2919.63,3765.37 ; pad.21@2932,3735.5 cw(c2932,3693.25) 2961.87,3723.13 cw(c2991.75,3753) pad.21@2949.5,3753 ; C7.1@3173.53,3099.62 ccw(c3145.83,3127.32) 3185,3127.32 ; C7.1@3180,3093.15 3178.15,3095 U6.16@3054.49,3095 3270,3095 v2(3272,3093) ; C7.1@3185,3095 3185,3500 pad.21@2932,3753 2238,3753 ; C7.1@3198.28,3086.68 cw(c3218.38,3066.59) 3218.38,3095 ; 3249.83,3095 cw(c3249.83,3070.83) v2@3266.92,3087.92 ; 3141.62,3095 cw(c3141.62,3066.59) 3161.72,3086.68 ccw(c3141.62,3066.59) 3141.62,3095
  Bottom Layer w25: T3.1@2046.57,3686.57 cw(c2014.14,3654.14) 2060,3654.14 cw(c2105.86,3654.14) T3.1@2073.43,3686.57 ; v1@2051.16,3563.84 ccw(c2029.82,3585.18) 2060,3585.18 ccw(c2090.18,3585.18) v1@2068.84,3563.84 ; v1(2060,3555) T3.1@2060,3700 ; P11.2@3115,640 3211,736 3211,3032 v2(3272,3093) ; P11.2@3115,657.03 ccw(c3115,698.14) 3144.07,669.07 ccw(c3173.14,640) P11.2@3132.03,640
VCC5: C3.2 D1.1 P11.1 pad.1@1380,3065 pad.5 pad.6 pad.7 pad.9 pad.10 pad.13 pad.23 pad.26 pad.28 R1.2 R3.1 R4.2 R7.2 T2.1 U1.2 U3.23 U4.8 U5.2 U5.3 U5.8 | length 9960
  Top Layer w50: R7.2@215,2153.15 v2(272.15,2153.15) ; v1(270,2335) 860,2335 pad.26@1015,2490 v1(1375,2490) ; v2(312,1906) 312,1926 ; U5.8@345.51,1945 415,1945 465,1995 U5.2@534.49,1995 U5.3@534.49,2045 ; v2(516,260) v1(2120,260) v1(3115,260) ; U1.2@920,3672.2 v2(920,3764) ; C3.2@1220,3333.15 1220,3425.55 v2@1370.55,3425.55 ; D1.1@1220,3622.01 cw(c1220,3567.09) 1258.84,3605.92 ; D1.1@1220,3624.57 1240.19,3624.57 1380,3484.76 v2(1380,3426.85) R3.1@1500,3426.85 ; R1.2@1229.44,3434.48 ccw(c1251,3456.04) R1.2@1251,3425.55 ; U3.23@1985,835 cw(c1985,750.5) 2044.75,810.25 ; U3.23@1985,840 2015,840 v1(2120,735)
  Bottom Layer w50: v1@210,741.3 210,1561 312,1663 v2(312,1906) 271,1962 v2@271,2153.15 ; 210,762.51 ccw(c261.21,762.51) v1(225,726.3) 225,551 v2(516,260) ; v2(272.15,2153.15) v1@272.15,2335 ; 350.51,435.51 v2(350.51,520) ; v2(920,3764) 1316,3764 T2.1@1380,3700 v2(1380,3426.85) v1@1380,2490 ; v1(2120,260) v1(2120,735) ; v1(3115,260) P11.1@3115,540
pads on no net: J3.6 J3.7 J3.8 J3.9 J4.6 J4.7 J4.8 J4.9 P10.1 P10.7 P10.17 P10.27 P10.28 U1.4 U2.4 U3.1 U3.18 U3.21 U3.31 U3.32 U3.33 U3.36 U5.1

## Keep-outs
Keep-Out Layer:
  lines w10: 78.74,3760 cw(c178.74,3760) 178.74,3860 ; 80,178.74 ccw(c180,178.74) 180,78.74 ; 3756.78,78.72 ccw(c3756.78,178.72) 3856.78,178.72 ; 3757.5,3857.5 cw(c3757.5,3757.5) 3857.5,3757.5
  lines w11.81: 78.74,78.74 78.74,3858.27 3858.27,3858.27 3858.27,78.74 78.74,78.74

## Silkscreen, mask and mechanical layers (free items; w line width, h text height)
Top Overlay:
  text "XDM-I Room V0.1 20180407" at 1295,115 h60

## Text inside footprints (layer, text, board x,y; h text height)
J3: Top Overlay "6" at 3624.13,2743.27 h59.06 r270; Top Overlay "9" at 3624.13,2416.1 h59.06 r270; Top Overlay "5" at 3254.06,2361.57 h59.06 r270; Top Overlay "1" at 3254.06,2787.95 h59.06 r270
J4: Top Overlay "6" at 3624.13,1303.27 h59.06 r270; Top Overlay "9" at 3624.13,976.1 h59.06 r270; Top Overlay "5" at 3254.06,921.57 h59.06 r270; Top Overlay "1" at 3254.06,1347.95 h59.06 r270
P10: Top Overlay "39" at 1265,2390 h50 r90; Top Overlay "40" at 1165,2390 h50 r90; Top Overlay "2" at 1170,300 h50 r90; Top Overlay "1" at 1265,310 h50 r90